# EAGLE board nets_v2 (EAGLE 9.6.2)
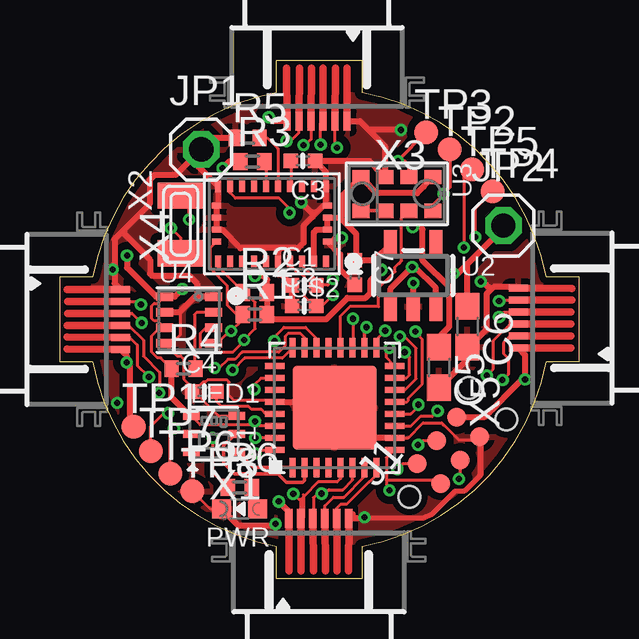
[diagram p0: board, top side]
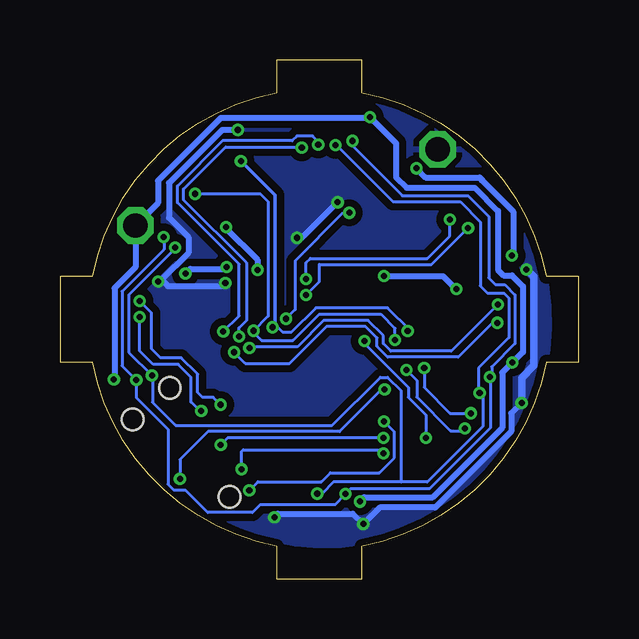
[diagram p1: board, bottom side, seen from below]

Size 21.63 x 21.63 mm. Coordinates in mm from the lower left corner, seen from the top.
Outline: 12.6,1.36 arc69 20.27,9.04 21.63,9.04 21.63,12.6 20.27,12.6 arc69 12.6,20.27 12.6,21.63 9.04,21.63 9.04,20.27 arc69 1.36,12.6 0,12.6 0,9.04 1.36,9.04 arc69 9.04,1.36 9.04,0 12.6,0 12.6,1.36
Copper layers (1*16): Top 0.035mm / dielectric 1.5mm / Bottom 0.035mm
Design rules "default *": minimum track width 5mil, minimum drill 0.25mm, track to track 5mil, track to pad 5mil, pad to pad 5mil, via to via 5mil, smd to smd 5mil, copper to edge 5mil, drill to drill 5mil, minimum pad ring 10mil, minimum via ring 5mil, stop-mask expansion 5mil, vias tented up to drill 11mil, thermal gap 10mil
Net classes: 1 power: width 0.254 mm; 2 lowpower: width 0.305 mm, drill 0.483 mm

## Footprints (pad centres in the part's own frame; a part is rotated, then mirrored left to right if it is on the bottom)
_0402NO = smd 0.6 x 0.6: 1 -0.508,0; 2 0.508,0
C0603 = smd 1.1 x 1: 1 -0.85,0; 2 0.85,0
QFN32_5MM = smd 0.8 x 0.25: 1 -2.5,1.75; 2 -2.5,1.25; 3 -2.5,0.75; 4 -2.5,0.25; 5 -2.5,-0.25; 6 -2.5,-0.75; 7 -2.5,-1.25; 8 -2.5,-1.75; 17 2.5,-1.75; 18 2.5,-1.25; 19 2.5,-0.75; 20 2.5,-0.25; 21 2.5,0.25; 22 2.5,0.75; 23 2.5,1.25; 24 2.5,1.75 | smd 0.25 x 0.8: 9 -1.75,-2.5; 10 -1.25,-2.5; 11 -0.75,-2.5; 12 -0.25,-2.5; 13 0.25,-2.5; 14 0.75,-2.5; 15 1.25,-2.5; 16 1.75,-2.5; 25 1.75,2.5; 26 1.25,2.5; 27 0.75,2.5; 28 0.25,2.5; 29 -0.25,2.5; 30 -0.75,2.5; 31 -1.25,2.5; 32 -1.75,2.5 | smd 3.5 x 3.5: 33 0,0
TC2030-MCP-NL = smd 0.787 x 0.787: 1 1.27,-0.635; 2 1.27,0.635; 3 2.54,-0.635; 4 2.54,0.635; 5 3.81,-0.635; 6 3.81,0.635 | hole 0.889: 0,0; 5.08,-1.016; 5.08,1.016
1X01 = drill 1.016 octagon: 1 0,0
APA102_2020 = smd 0.7 x 0.35: 1 -0.95,-0.75; 2 -0.95,0; 3 -0.95,0.75; 4 0.95,0.75; 5 0.95,0; 6 0.95,-0.75
CHIPLED_0603_NOOUTLINE = smd 0.8 x 0.8: A 0,-0.75; C 0,0.75
R0402 = smd 0.6 x 0.7: 1 -0.5,0; 2 0.5,0
TP10R = smd 1 x 1: TP 0,0
SOT23-5 = smd 0.55 x 1.2: 1 -0.95,-1.3; 2 0,-1.3; 3 0.95,-1.3; 4 0.95,1.3; 5 -0.95,1.3
APDS-9960 = smd 0.6 x 0.72: 1 0.7,1.505; 2 0.7,0.505; 3 0.7,-0.495; 4 0.7,-1.495; 5 -0.7,-1.495; 6 -0.7,-0.495; 7 -0.7,0.505; 8 -0.7,1.505
BME280 = smd 0.7 x 0.35: 1 1.025,0.975; 2 1.025,0.325; 3 1.025,-0.325; 4 1.025,-0.975; 5 -1.025,-0.975; 6 -1.025,-0.325; 7 -1.025,0.325; 8 -1.025,0.975
BNO055 = smd 0.25 x 0.475: 1 -2.25,1.562; 6 -2.25,-1.562; 7 -1.75,-1.562; 8 -1.25,-1.562; 9 -0.75,-1.562; 10 -0.25,-1.562; 11 0.25,-1.562; 12 0.75,-1.562; 13 1.25,-1.562; 14 1.75,-1.562; 15 2.25,-1.562; 20 2.25,1.562; 21 1.75,1.562; 22 1.25,1.562; 23 0.75,1.562; 24 0.25,1.562; 25 -0.25,1.562; 26 -0.75,1.562; 27 -1.25,1.562; 28 -1.75,1.562 | smd 0.375 x 0.25: 2 -2.312,0.75; 3 -2.312,0.25; 4 -2.312,-0.25; 5 -2.312,-0.75; 16 2.312,-0.75; 17 2.312,-0.25; 18 2.312,0.25; 19 2.312,0.75
52745-0690 = smd 0.3 x 0.8: 1 -1.25,2.5; 2 -0.75,2.5; 3 -0.25,2.5; 4 0.25,2.5; 5 0.75,2.5; 6 1.25,2.5
XTAL3215 = smd 1.1 x 1.9: P$1 1.2,0; P$2 -1.2,0

## Placement (x,y rotation side)
C1  22pF  [_0402NO]  10.18,12.24 0 top
C2  22pF  [_0402NO]  10.18,11.38 0 top
C3  0.1uF  [_0402NO]  10.13,17.42 180 top
C4  1uF  [_0402NO]  6.02,7.79 0 top
C5  10uF  [C0603]  15.8,8.81 270 top
C6  10uF  [C0603]  16.99,10.51 270 top
C7  1uF  [_0402NO]  12.29,12.77 270 top
IC1  ATSAMD21E  [QFN32_5MM]  11.45,7.13 90 top
J1  [TC2030-MCP-NL]  14.57,3.41 50 top
JP1  [1X01]  5.89,17.9 0 top
JP2  [1X01]  18.49,14.73 0 top
LED1  AP102-2020  [APA102_2020]  6.42,6.04 0 top
PWR  red  [CHIPLED_0603_NOOUTLINE]  7.49,2.92 90 top
R1  1k  [R0402]  8.12,11.02 0 top
R2  1k  [R0402]  8.12,11.93 0 top
R3  1k  [R0402]  8.02,17.4 0 top
R4  1k  [R0402]  5.15,8.76 0 top
R5  1k  [R0402]  7.82,18.39 0 top
R6  1k  [R0402]  7.49,3.81 0 top
TP1  TPTP10R  [TP10R]  3.07,6.35 0 top
TP2  TPTP10R  [TP10R]  16.25,17.9 0 top
TP3  TPTP10R  [TP10R]  15.26,18.61 0 top
TP4  TPTP10R  [TP10R]  18.03,16.15 0 top
TP5  TPTP10R  [TP10R]  17.19,17.07 0 top
TP6  TPTP10R  [TP10R]  4.59,4.39 0 top
TP7  TPTP10R  [TP10R]  3.78,5.33 0 top
TP8  TPTP10R  [TP10R]  5.51,3.65 0 top
U2  AP2112K-3.3  [SOT23-5]  14.73,12.65 0 top
U3  APDS-9960  [APDS-9960]  14.04,16.05 270 top
U4  BME280  [BME280]  5.38,10.79 0 top
U$2  BNO055  [BNO055]  8.84,14.8 180 top
X1  52745-0690  [52745-0690]  10.79,0.02 0 top
X2  32.768  [XTAL3215]  5.03,14.78 270 top
X3  52745-0690  [52745-0690]  10.72,21.59 180 top
X4  52745-0690  [52745-0690]  0.02,10.82 270 top
X5  52745-0690  [52745-0690]  21.61,10.87 90 top

## Library data of the parts
C1 C2 = microbuilder; MF: WURTH ELEKTRONIK; MPN: 885012005042; OC_NEWARK: 04AJ6077
C3 = microbuilder; MF: KEMET; MPN: R79IC3100Z340J; OC_NEWARK: 58Y5428
C4 C7 IC1 PWR U3 U$2 = microbuilder; OC_NEWARK: unknown
C5 C6 = rcl; SPICEPREFIX: C
J1 = tag-connect-2030; OC_NEWARK: unknown
JP1 JP2 = pinhead
LED1 U4 = microbuilder
R1-R6 = rcl; OC_NEWARK: unknown; SPICEPREFIX: R
TP1-TP8 = testpad; OC_NEWARK: unknown
U2 = adafruit_power; OC_NEWARK: unknown
X1 X3-X5 = con-molex; MF: MOLEX; MPN: 52745-0690; OC_FARNELL: unknown; OC_NEWARK: unknown
X2 = adafruit2; OC_NEWARK: unknown

## Nets
3.3V: C5.1 C7.1 IC1.9 IC1.30 J1.1 LED1.3 R1.2 R2.2 R3.1 R4.1 U2.5 U3.5 U3.8 U4.6 U4.8 U$2.3 U$2.4 U$2.28
5V [power]: C6.1 J1.6 JP2.1 TP1.TP U2.1 U2.3 X1.1 X3.6 X4.6 X5.1
D+: IC1.24 TP6.TP
D-: IC1.23 TP7.TP
GND: C1.1 C2.1 C3.1 C4.1 C5.2 C6.2 C7.2 IC1.10 IC1.28 IC1.33 J1.5 JP1.1 LED1.4 PWR.C R5.1 TP8.TP U2.2 U3.6 U4.1 U4.5 U4.7 U$2.2 U$2.5 U$2.6 U$2.15 U$2.16 U$2.17 U$2.18 U$2.25 X1.6 X3.1 X4.1 X5.6
INT_APS: IC1.20 U3.2
INT_BNO: IC1.19 U$2.14
N$1: C1.2 U$2.27 X2.P$2
N$2: C2.2 U$2.26 X2.P$1
N$3: C3.2 U$2.9
N$4: PWR.A R6.2
N$5: U3.3 U3.4
N$6: R5.2 U$2.10
N$8: R3.2 U$2.11
N$9: R4.2 U4.2
N$14: IC1.1 LED1.6
N$18: IC1.22 R6.1
N$20: IC1.2 LED1.5
NRESET: IC1.26 J1.3
RX0: IC1.7 X1.4
RX1: IC1.11 X5.4
RX2: IC1.13 X3.3
RX3: IC1.15 X4.3
SCL0: IC1.18 R1.1 TP3.TP U3.7 U4.4 U$2.19
SCL1: IC1.6 TP5.TP X1.3 X3.4 X4.4 X5.3
SDA0: IC1.17 R2.1 TP2.TP U3.1 U4.3 U$2.20
SDA1: IC1.5 TP4.TP X1.2 X3.5 X4.5 X5.2
SWDCLK: IC1.31 J1.4
SWDIO: IC1.32 J1.2
TX0: IC1.8 X1.5
TX1: IC1.12 X5.5
TX2: IC1.14 X3.2
TX3: IC1.16 X4.2
VDDCORE: C4.2 IC1.29

## Tracks (layer width: path | path; a pad name or v marks a point on that pad's centre or on a via)
3.3V  (via drill 0.25)
  Top 0.127: U4.6 4.26,10.56 | 4.26,10.56 4.07,10.75 3.93,10.75 3.82,10.86 3.82,11.37 3.93,11.48 4.07,11.48 U4.8 | IC1.30 8.3,6.38 v8.12,6.56 7.99,6.42 6.09,6.42 6.08,6.43 5.83,6.43 LED1.3 | IC1.9 13.61,5.04 13.61,4.11 | J1.1 15.73,4.11 13.61,4.11 | 13.61,4.11 13.61,3.81 v13.74,3.68 | R4.1 4.2,9.22 4.06,9.22 3.82,9.46 3.82,10.11 4.26,10.56 | 13,13.34 13,13.28
  Top 0.254: 11.68,15.05 U$2.4 U$2.3 10.69,14.55 10.59,14.45 U$2.28 | 11.68,15.05 11.73,15.11 11.73,15.93 U3.5 12.93,16.36 12.93,16.34 13.2,16.07 14.89,16.07 15.16,16.34 15.16,16.36 U3.8 | 11.68,15.05 12.34,14.39 12.34,13.33 C7.1 13,13.28 | LED1.3 5.42,6.79 4.65,7.56 R4.1 | R3.1 7.06,17.4 v6.78,17.12 | v2.79,13.48 2.79,12.98 4,11.77 U4.8 4.78,11.77 v5.1,12.09 | C5.1 15.8,10.08 16.23,10.51 16.23,12.16 15.12,13.27 15.12,14.58 15.04,14.66 v14.71,14.66 | 13,13.28 13.11,13.28 U2.5 | 13,13.28 v13.4,12.88 v13.39,12.88 12.95,12.44 12.95,11.91 12.75,11.71 11.98,11.71 11.09,10.82 8.83,10.82 R1.2 R2.2 8.62,12.46 8.63,12.47 8.48,12.62 v8.12,12.62
  Bottom 0.127: v13.74,3.68 13.38,4.04 10.73,4.04 10.36,4.42 8.32,4.42 7.69,5.05 7.69,6.13 v8.12,6.56
  Bottom 0.254: v6.78,17.12 6.4,16.73 4.14,16.73 4.02,16.62 4.05,16.62 2.74,15.31 2.74,13.43 v2.79,13.48 | v14.71,14.66 14.71,14.61 13.4,13.31 v13.4,12.88 | v8.12,12.62 5.66,12.62 5.13,12.09 v5.1,12.09
5V  (via drill 0.25)
  Top 0.254: U2.1 13.78,12.1 v14.68,13 v14.69,13 14.81,13 15.67,12.14 15.67,11.36 U2.3 | JP2.1 18.49,14.63 16.99,13.13 | C6.1 16.99,13.13 | J1.6 17.68,6.74 19.26,8.32 v19.39,8.32 19.39,9.34 X5.1 | TP1.TP 2.9,6.51 2.9,8.89 v2.78,9.01 2.78,9.31 X4.6 | 16.99,13.13 16.58,12.72 v16.41,12.72 | X3.6 8.87,19.09 v8.71,19.25 | v9.12,3.22 9.54,2.8 X1.1
  Top 0.305: X1.1 9.55,0.33 | X5.1 21.31,9.62 | X3.6 9.45,21.28 | X4.6 0.3,9.57
  Bottom 0.254: v14.69,13 14.76,12.92 16.2,12.92 v16.41,12.72 | v9.12,3.22 8.94,3.4 6.09,3.4 3.2,6.3 3.2,8.59 v2.78,9.01 2.33,9.46 2.33,12.19 2.79,12.65 3.15,12.65 3.37,12.87 3.37,15.34 4.34,16.3 7.18,16.3 7.62,16.73 7.62,18.16 v8.71,19.25 8.79,19.25 8.81,19.22 14.92,19.22 17.55,16.6 17.55,15.67 JP2.1 18.49,12.99 19.36,12.12 19.36,8.34 v19.39,8.32
D+  (via drill 0.25)
  Top 0.127: TP6.TP 4.59,6.12 v4.75,6.27 | IC1.24 9.27,9.2 7.7,9.2 7.21,8.71 v7.19,8.71
  Bottom 0.127: v4.75,6.27 4.85,6.17 5.35,6.17 6.76,7.57 6.76,8.28 v7.19,8.71
D-  (via drill 0.25)
  Top 0.127: IC1.23 10.2,10.06 10.04,10.22 9.5,10.22 9.39,10.11 9.39,9.72 9.12,9.45 7.6,9.45 7.3,9.15 7,9.15 6.61,8.76 6.47,8.76 v6.45,8.78 | TP7.TP 3.78,6.36 4.33,6.9 v4.5,6.9
  Bottom 0.127: v6.45,8.78 6.45,7.98 5.37,6.9 v4.5,6.9
GND  (via drill 0.25)
  Top 0.127: PWR.C 6.26,2.92 5.52,3.65 TP8.TP | 5.57,7.79 5.97,8.2 6.06,8.2 6.15,8.28 6.97,8.28 7.06,8.2 7.06,7.64 7.26,7.44 8.9,7.44 IC1.28 | LED1.4 6.61,6.79 5.61,7.79 C4.1 5.51,7.98 5.16,8.33 5.16,9.17 5.03,9.3 4.87,9.3 U4.5 4.66,9.82 5,10.16 5,11.1 4.99,11.12 | IC1.10 14.52,5.88 15.14,6.5 15.91,6.5 16.01,6.4 16.02,6.4 16.63,5.79 17.37,5.79 J1.5
  Top 0.203: 17.52,4.32 16.86,3.65 16.47,3.65 15.5,2.68 15.16,2.52 X1.6
  Top 0.254: C2.1 C1.1 9.09,12.83 U$2.25 9.09,13.66 9.22,13.79 | IC1.28 10.21,7.38 10.46,7.13 IC1.33 12.7,5.88 IC1.10 | 5.57,7.79 C4.1 | X4.1 2.27,12.32 2.27,12.82 2.27,14.15 2.69,14.58 | 2.69,14.58 3.73,15.62 3.73,16.62 3.95,16.84 4.82,16.84 JP1.1 | R5.1 6.37,18.39 JP1.1 | 10.71,15.28 10.98,15.55 U$2.5 11.09,15.62 U$2.6 11.09,16.97 C3.1 12.9,17.42 13.16,17.15 13.16,17.14 U3.6 13.55,18.04 12.85,18.74 | 9.22,13.79 9.93,13.79 10.16,14.02 10.16,14.73 10.71,15.28 | C7.2 12.29,12.32 11.68,12.92 11.68,13.52 U$2.2 11.31,14.05 11.48,14.22 v11.76,14.22 | JP1.1 5.77,17.79 5.77,17.18 U$2.15 6.59,15.62 U$2.16 U$2.17 U$2.18 6.75,14.55 7.52,13.79 9.22,13.79 | X3.1 12.5,19.09 12.85,18.74 | v10.06,15.7 10.47,15.28 10.71,15.28 | U4.1 5.71,11.77 | 5.71,11.77 5.64,11.77 4.99,11.12 U4.7 | U2.2 v14.73,12.32 v14.74,12.33 | 17.96,12.06 17.62,12.39 v17.55,12.39 | 17.96,12.06 18.06,12.16 19.07,12.16 X5.6 | 17.96,12.06 17.78,11.88 17.78,10.39 16.99,9.6 C6.2 16.99,9.15 C5.2 | 2.69,14.58 2.69,14.37 3.76,13.31 3.76,12.72 3.83,12.64 5.38,12.64 5.71,12.31 5.71,11.77 | PWR.C 7.45,2.21 8.91,2.21 v8.99,2.28 | v12.7,2.56 12.66,2.52 X1.6 12.21,2.69 | 17.52,4.32 17.52,5.9 J1.5 | v14.22,18.72 14.2,18.74 12.85,18.74
  Top 0.305: X1.6 12.04,0.33 | X5.6 21.33,12.11 | X3.1 11.96,21.26 11.96,21.28 | 2.27,12.82 v2.19,12.9 | X4.1 0.3,12.06
  Bottom 0.254: v11.76,14.22 11.56,14.22 10.07,15.7 v10.06,15.7 | v14.74,12.33 14.87,12.21 17.13,12.21 17.32,12.39 | 17.32,12.39 v17.55,12.39 | 17.32,12.39 17.4,12.47 16.28,13.59 16.28,14.25 17.09,15.06 17.09,16.5 14.88,18.72 v14.22,18.72 | v12.7,2.56 12.54,2.71 9.42,2.71 v8.99,2.28 8.3,2.97 5.99,2.97 2.82,6.14 2.82,6.91 v2.38,7.34
  Bottom 0.305: v2.19,12.9 1.88,12.61 1.88,8.89 2.38,8.38 v2.38,7.34
  pour Top (isolate 0.305): 9.83,20.37 7.92,19.91 arc26 5.25,18.59 arc28 1.77,13.92 arc35 1.39,9.47 arc13 2.59,6.04 arc21 3.88,4.26 arc13 5.84,2.79 arc42 13.05,1.6 arc82 20.29,11.1 arc27 18.74,16.15 arc47 13.43,20.04 arc15 9.85,20.37
  pour Bottom (isolate 0.305): 12.57,20.16 10.72,20.29 arc27 7.49,19.76 arc18 4.39,17.83 arc135 9.9,1.32 arc107 20.09,13.23 arc68
INT_APS
  Top 0.127: IC1.20 11.7,10.97 12.09,11.35 13.29,11.35 13.29,12.13 13.97,12.81 13.97,13.01 14.1,13.13 14.11,13.13 14.25,13.27 14.25,15.05 U3.2
INT_BNO  (via drill 0.25)
  Top 0.127: IC1.19 12.21,9.65 v12.21,10.84 | v9.57,15.26 9.57,15.44 9.14,15.87 7.31,15.87 7.09,16.1 U$2.14
  Bottom 0.127: v12.21,10.84 11.83,11.22 11.83,13.26 9.83,15.26 v9.57,15.26
N$1  (via drill 0.25)
  Top 0.127: U$2.27 10.09,13.06 10.69,12.45 C1.2 11.17,12.24 11.38,12.44 v11.38,12.49 | v5.38,14.98 5.38,15.62 X2.P$2
  Bottom 0.127: v11.38,12.49 11.38,13.18 11.2,13.36 6.32,13.36 5.38,14.3 v5.38,14.98
N$2  (via drill 0.25)
  Top 0.127: U$2.26 9.59,13.07 9.93,12.73 10.05,12.73 10.16,12.62 10.16,11.78 10.57,11.38 C2.2 10.92,11.38 v11.38,11.83 | v4.62,14.63 5.03,14.22 X2.P$1
  Bottom 0.127: v11.38,11.83 10.82,12.39 10.82,13.1 6.14,13.1 v4.62,14.63
N$3
  Top 0.127: C3.2 9.62,16.4 U$2.9
N$4
  Top 0.127: PWR.A 7.99,3.17 R6.2
N$5
  Top 0.152: U3.3 U3.4
N$6
  Top 0.127: R5.2 8.63,18.39 9.09,17.93 U$2.10
N$8
  Top 0.127: R3.2 8.59,17.33 U$2.11
N$9
  Top 0.127: R4.2 5.6,8.81 5.6,11.01 5.71,11.12 U4.2
N$14
  Top 0.152: LED1.6 7.43,5.29 8.08,4.65 9.69,4.65 IC1.1
N$18  (via drill 0.25)
  Top 0.127: v8.94,9.92 8.94,10.08 9.33,10.48 10.24,10.48 10.7,10.02 IC1.22 | v6.37,5.88 6.37,4.42 R6.1
  Bottom 0.127: v8.94,9.92 8.94,9.82 7.11,7.99 7.11,7.57 6.37,6.83 v6.37,5.88
N$20
  Top 0.152: LED1.5 7.31,6.04 6.82,5.55 6.82,5.03 6.83,5.02 6.83,4.82 7.29,4.37 9.09,4.37 9.45,4.01 10.11,4.01 10.2,4.11 IC1.2
NRESET  (via drill 0.25)
  Top 0.127: IC1.26 8.92,8.35 8.38,8.35 8.1,8.07 v8.1,7.9 | v16.63,4.16 16.69,4.21 J1.3
  Bottom 0.127: v8.1,7.9 8.23,7.9 9.98,6.14 15.47,6.14 16.63,4.97 v16.63,4.16
RX0
  Top 0.127: X1.4 11.04,3.04 11.4,3.4 11.84,3.4 12.7,4.27 IC1.7
  Top 0.305: X1.4 11.07,0.33
RX1  (via drill 0.25)
  Top 0.127: IC1.11 14.64,6.38 15.02,6.76 15.52,6.76 v15.74,6.99 | v18.31,10.92 18.51,11.12 X5.4
  Top 0.305: X5.4 | 21.31,11.12 X5.4
  Bottom 0.127: v15.74,6.99 15.8,6.99 16.18,7.37 16.18,8.4 16.71,8.94 17.75,8.94 18.31,9.5 v18.31,10.92
RX2  (via drill 0.25)
  Top 0.127: IC1.13 14.47,7.38 14.52,7.44 14.52,7.54 15.1,8.12 15.1,9.98 14.97,10.12 14.98,10.13 14.98,10.15 v14.83,10.31 | v10.87,18.11 10.87,18.99 X3.3
  Top 0.305: X3.3 10.97,21.28
  Bottom 0.127: v14.83,10.31 14.17,10.97 14.17,13.12 16.74,15.69 | 16.74,15.67 16.74,15.69 | 16.74,15.69 16.74,16.38 14.86,18.26 11.96,18.26 11.76,18.46 11.1,18.46 10.87,18.23 v10.87,18.11
RX3  (via drill 0.25)
  Top 0.127: X4.3 3,11.07 v3.4,10.67 | IC1.15 14.45,8.38 14.58,8.51 14.58,9.24 v14.37,9.45
  Top 0.305: X4.3 0.33,11.07
  Bottom 0.127: v3.4,10.67 3.6,10.67 5.03,9.24 7.97,9.24 8.42,9.69 8.42,10.04 8.89,10.52 10.53,10.52 12.06,8.99 13.92,8.99 v14.37,9.45
SCL0  (via drill 0.25)
  Top 0.127: U$2.19 6.27,13.8 6.27,12.93 6.98,12.21 6.98,11.4 7.37,11.02 R1.1 7.62,10.82 v7.14,10.33 7.1,10.37 6.55,9.82 U4.4
  Top 0.152: v12.77,10.49 12.7,10.42 IC1.18 | U3.7 14.55,17.26 14.38,17.42 v14.09,17.42 14.09,17.45 TP3.TP
  Bottom 0.127: v12.77,10.49 12.55,10.49 12.34,10.27 12,10.27 10.97,11.3 7.98,11.3 7.07,10.39 v7.14,10.33
  Bottom 0.152: v12.77,10.49 12.67,10.49 12.67,16 v14.09,17.42
SCL1  (via drill 0.25)
  Top 0.127: X1.3 10.56,2.54 10.56,3.37 10.74,3.55 v10.91,3.55 11.06,3.55 11.23,3.71 11.79,3.71 12.2,4.12 IC1.6 | X4.4 2.86,10.57 3.48,9.95 3.48,9.29 4.16,8.6 4.16,7.77 v4.14,7.74 | X5.3 19.1,10.61 18.76,10.61 18.06,9.91 18.06,8.73 v17.8,8.48 | X3.4 10.47,18.32 10.23,18.09 v10.15,18.09 | TP5.TP 16.84,16.71 v16.84,13.81
  Top 0.305: X1.3 10.56,0.33 | X5.3 21.31,10.61 | X3.4 10.49,21.28 | X4.4 0.3,10.56
  Bottom 0.127: 7.41,4.03 10.23,4.03 10.72,3.55 v10.91,3.55 | 7.41,4.03 7.41,7.84 7.97,8.4 8.28,8.4 10.28,6.4 16.81,6.4 17.78,7.36 17.78,8.45 v17.8,8.48 18.77,9.45 18.77,11.84 16.84,13.77 v16.84,13.81 | v10.15,18.09 10.11,18.09 7.74,15.72 4.95,15.72 4.11,14.88 4.11,12.21 3.81,11.91 3.12,11.91 2.92,11.71 2.92,10.05 4.19,8.78 4.19,7.79 v4.14,7.74 4.01,7.62 4.01,6.35 6.32,4.03 7.41,4.03
SDA0  (via drill 0.25)
  Top 0.127: U$2.20 6.59,13.02 7.62,11.98 R2.1 7.73,11.93 8.13,11.53 8.13,10.43 v7.67,9.96 7.72,9.96 7.2,9.45 5.86,9.45 5.86,10.26 6.07,10.47 U4.3 | IC1.17 13.2,9.98 v13.56,10.34 | U3.1 15.55,15.6 v16,16.05 16.25,16.3 TP2.TP
  Bottom 0.127: v16,16.05 13.28,16.05 12.95,15.72 12.95,10.95 v13.56,10.34 13.56,10.28 13.23,9.94 11.92,9.94 10.82,11.04 8.26,11.04 7.67,10.45 v7.67,9.96
SDA1  (via drill 0.25)
  Top 0.127: IC1.5 11.7,4.18 11.55,4.03 10.76,4.03 10.19,3.46 | X4.5 2.91,10.07 3.22,9.75 3.22,8.9 v3.71,8.42 | 10.04,2.54 10.04,3.26 | v9.72,3.54 9.74,3.54 10.04,3.24 10.04,3.31 10.19,3.46 | X5.2 19.09,10.14 18.79,10.14 18.5,9.85 18.5,9.39 18.69,9.19 18.69,8.53 v18.45,8.29 | X3.5 9.95,19.07 9.95,18.59 9.62,18.26 v9.44,18.26 | TP4.TP 17.29,15.41 17.29,14.27 v17.32,14.25 | X1.2 10.14,2.55 10.14,3.5 10.19,3.46
  Top 0.254: X1.2 10.04,2.54
  Top 0.305: X1.2 10.06,0.33 | X5.2 21.31,10.13 | X3.5 9.98,21.28 | X4.5 0.3,10.08
  Bottom 0.127: v9.44,18.26 9.44,18.05 7.36,15.97 4.62,15.97 3.76,15.11 3.76,12.54 3.48,12.26 3.1,12.26 2.66,11.83 2.66,9.8 3.63,8.84 3.63,8.5 v3.71,8.42 3.68,8.39 3.68,6.3 6.21,3.76 9.5,3.76 v9.72,3.54 10.18,3.08 13.29,3.08 13.61,2.76 15.48,2.76 16.41,3.69 16.88,3.69 17.13,3.94 17.13,6.23 18.45,7.56 v18.45,8.29 19.05,8.88 19.05,11.99 17.29,13.74 17.29,14.22 v17.32,14.25
SWDCLK  (via drill 0.25)
  Top 0.127: IC1.31 8.17,5.88 8.15,5.87 v8.14,5.88 | v14.93,5.58 15.11,5.76 J1.4
  Bottom 0.127: v8.14,5.88 14.64,5.88 v14.93,5.58
SWDIO  (via drill 0.25)
  Top 0.127: J1.2 14.29,4.79 v14.07,4.57 | v8.15,5.23 8.31,5.38 IC1.32
  Bottom 0.127: v14.07,4.57 14.07,5.3 13.99,5.38 8.31,5.38 v8.15,5.23
TX0
  Top 0.127: X1.5 11.54,2.96 11.71,3.12 11.96,3.12 12.88,4.04 12.91,4.04 13.2,4.34 IC1.8
  Top 0.305: X1.5 11.55,0.33
TX1  (via drill 0.25)
  Top 0.127: IC1.12 14.63,6.88 14.97,7.22 14.97,7.24 v14.94,7.26 | v18.31,11.58 18.35,11.62 X5.5
  Top 0.305: X5.5 21.33,11.63
  Bottom 0.127: v14.94,7.26 15.25,7.57 15.69,7.57 15.9,7.77 15.9,8.53 16.58,9.22 17.45,9.22 17.82,9.59 17.82,11.09 v18.31,11.58
TX2  (via drill 0.25)
  Top 0.127: IC1.14 14.39,7.88 14.84,8.34 14.84,9.62 14.36,10.1 v14.17,10.1 | v11.55,17.98 11.47,18.07 X3.2
  Top 0.305: X3.2 11.48,21.28
  Bottom 0.127: v14.17,10.1 14.17,10.46 13.87,10.76 13.87,13.18 16.48,15.8 16.48,16.25 14.73,18 11.58,18 v11.55,17.98
TX3  (via drill 0.25)
  Top 0.127: X4.2 3.25,11.57 v3.37,11.44 | v13.74,9.62 13.64,9.62 13.6,9.58 13.6,9.24 IC1.16
  Top 0.305: X4.2 0.33,11.55
  Bottom 0.127: v3.37,11.44 5.32,9.5 7.85,9.5 8.15,9.8 8.15,10.13 8.79,10.77 10.64,10.77 11.74,9.67 13.74,9.67 v13.74,9.62
VDDCORE
  Top 0.127: IC1.29 8.57,6.88 8.39,7.06 7.99,7.06 7.87,7.18 6.73,7.18 6.52,7.39 C4.2

## Text on the board
tDocu: NETSv3.0 | Networked E-Skin
bDocu: irmandy@mit / feb 24